# EAGLE board 12VAttinyDischargeChecker-B2 (EAGLE 8.5.2)
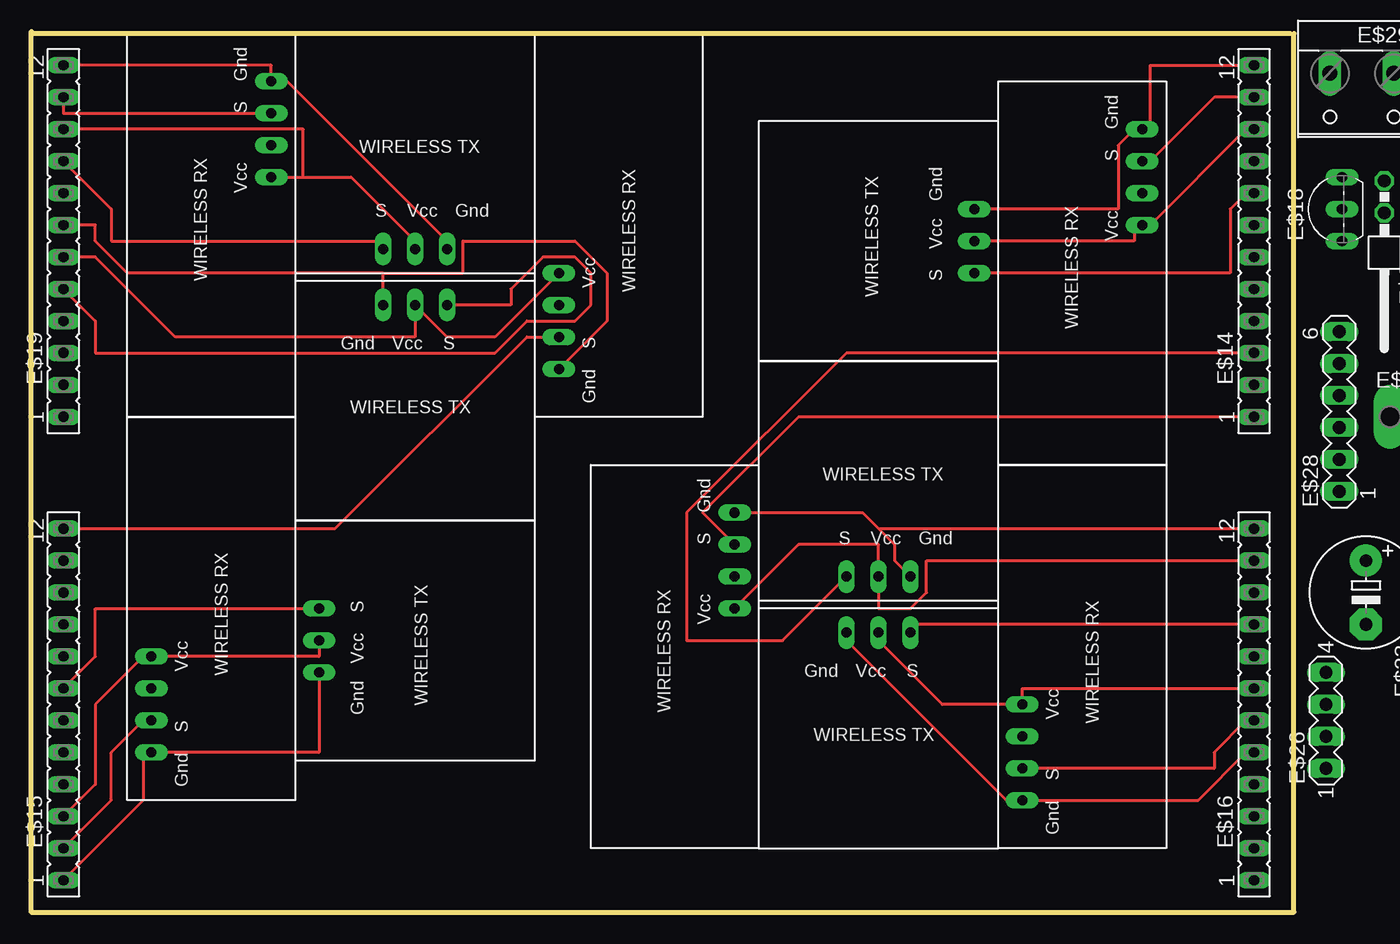
[diagram p0: board, top side]

Size 100.33 x 70 mm. Coordinates in mm from the lower left corner, seen from the top.
Outline: 0,69.85 0,0 100.33,0 100.33,69.85
Outline: 0,69.85 0,70
Outline: 0,69.85 100,69.85
Copper layers (1*16): Top 0.035mm / dielectric 1.5mm / Bottom 0.035mm
Design rules "default": minimum track width 10mil, minimum drill 24mil, track to track 8mil, track to pad 8mil, pad to pad 8mil, via to via 8mil, smd to smd 8mil, copper to edge 40mil, drill to drill 8mil, minimum pad ring 10mil, minimum via ring 8mil, stop-mask expansion 4mil, vias tented up to drill 0mil, thermal gap 10mil

## Footprints (pad centres in the part's own frame; a part is rotated, then mirrored left to right if it is on the bottom)
WIRELESS-RX-FLAT = drill 0.8 long: P$1 3.81,-6.985; P$2 6.35,-6.985; P$3 8.89,-6.985; P$4 11.43,-6.985
WIRELESS-TX-FLAT = drill 0.8 long: P$1 0.635,-6.35; P$2 -1.905,-6.35; P$3 3.175,-6.35
FE12 = drill 0.813 long: 1 -13.97,0; 2 -11.43,0; 3 -8.89,0; 4 -6.35,0; 5 -3.81,0; 6 -1.27,0; 7 1.27,0; 8 3.81,0; 9 6.35,0; 10 8.89,0; 11 11.43,0; 12 13.97,0
0204/7 = drill 0.813 octagon: 1 -3.81,0; 2 3.81,0
TO92- = drill 0.813 long: 1 2.54,0; 2 0,0; 3 -2.54,0
1X01/90 = drill 1.016 long: 1 -1.27,-3.81
E5-8,5 = drill 1.016 pad 2.54: + -2.54,0 | drill 1.016 pad 2.54 octagon: - 2.54,0
MA04-1 = drill 1.016 long: 1 -3.81,0; 2 -1.27,0; 3 1.27,0; 4 3.81,0
MA06-1 = drill 1.016 long: 1 -6.35,0; 2 -3.81,0; 3 -1.27,0; 4 1.27,0; 5 3.81,0; 6 6.35,0
W237-132 = drill 1.194 long: 1 -2.54,-0.635; 2 2.54,-0.635
RS-2,5 = drill 0.813 pad 1.6 octagon: 1 -1.27,0; 2 1.27,0
2X02/90 = drill 1.016 octagon: 1 -1.27,-6.35; 2 -1.27,-3.81; 3 1.27,-6.35; 4 1.27,-3.81
P1-17Y = drill 1.702 pad 2.121 long: TP 0,0

## Placement (x,y rotation side)
E$1  [WIRELESS-RX-FLAT]  12.06,54.61 90 top
E$2  [WIRELESS-RX-FLAT]  16.51,24.13 270 top
E$3  [WIRELESS-TX-FLAT]  29.21,22.23 270 top
E$4  [WIRELESS-TX-FLAT]  29.84,59.05 0 top
E$5  [WIRELESS-RX-FLAT]  48.9,54.61 270 top
E$6  [WIRELESS-TX-FLAT]  31.11,41.91 180 top
E$7  [WIRELESS-RX-FLAT]  85.72,20.32 270 top
E$8  [WIRELESS-TX-FLAT]  67.94,15.88 180 top
E$9  [WIRELESS-RX-FLAT]  81.28,50.8 90 top
E$10  [WIRELESS-TX-FLAT]  68.58,52.7 90 top
E$11  [WIRELESS-RX-FLAT]  48.9,20.32 90 top
E$12  [WIRELESS-TX-FLAT]  66.67,33.02 0 top
E$14  [FE12]  97.16,53.34 90 top
E$15  [FE12]  2.54,16.51 90 top
E$16  [FE12]  97.16,16.51 90 top
E$17  [0204/7]  113.03,25.4 90 top  (outside the outline)
E$18  [TO92-]  104.14,55.88 90 top  (outside the outline)
E$19  [FE12]  2.54,53.34 90 top
E$22  [1X01/90]  112.39,40.01 180 top  (outside the outline)
E$23  [E5-8,5]  106.05,25.4 270 top  (outside the outline)
E$26  [MA04-1]  102.87,15.24 90 top
E$28  [MA06-1]  103.93,39.79 90 top  (outside the outline)
E$29  [W237-132]  105.73,66.04 180 top
E$30  [RS-2,5]  113.03,50.8 90 top  (outside the outline)
E$31  [2X02/90]  108.78,51.77 180 top  (outside the outline)
E$35  [MA04-1]  113.03,13.97 90 top  (outside the outline)
E$44  [P1-17Y]  107.95,39.37 0 top  (outside the outline)

## Library data of the parts
E$1-E$12 = LSGPackages
E$14-E$16 E$19 = con-lsta
E$17 = eagle-ltspice
E$18 = transistor-fet
E$22 E$31 = pinhead
E$23 = ref-packages-longpad
E$26 E$28 E$35 = con-lstb
E$29 = con-wago-508
E$30 = discrete
E$44 = testpad

## Nets
S$2: E$1.P$4 E$4.P$3 E$19.12
S$3: E$5.P$1 E$6.P$1 E$19.6
S$4: E$19.8
S$5: E$7.P$4 E$8.P$3 E$16.5
S$7: E$1.P$1 E$4.P$1 E$19.10
S$8: E$5.P$4 E$6.P$3 E$19.7
S$9: E$2.P$4 E$3.P$3 E$15.1
S$10: E$2.P$1 E$3.P$1 E$15.3
S$11: E$2.P$3 E$15.2
S$12: E$1.P$3 E$19.11
S$13: E$7.P$1 E$8.P$1 E$16.7
S$14: E$3.P$2 E$15.7
S$15: E$4.P$2 E$19.9
S$16: E$6.P$2 E$19.5
S$17: E$9.P$3 E$14.11
S$18: E$11.P$1 E$12.P$1 E$16.11
S$19: E$11.P$4 E$12.P$3 E$16.12
S$20: E$9.P$4 E$10.P$3 E$14.12
S$21: E$9.P$1 E$10.P$1 E$14.10
S$22: E$10.P$2 E$14.8
S$23: E$12.P$2 E$14.3
S$24: E$8.P$2 E$16.9
S$25: E$7.P$3 E$16.6
S$26: E$5.P$3 E$15.12
S$27: E$11.P$3 E$14.1

## Tracks (layer width: path | path; a pad name or v marks a point on that pad's centre or on a via)
S$2
  Top 0.254: E$4.P$3 33.02,53.34 20.32,66.04 E$1.P$4 19.05,67.31 E$19.12
S$3
  Top 0.254: E$5.P$1 36.83,45.72 33.02,45.72 E$6.P$1 30.48,45.72 11.43,45.72 5.08,52.07 E$19.6
S$5
  Top 0.254: E$8.P$3 64.77,21.59 77.47,8.89 E$7.P$4 92.71,8.89 96.52,12.7 E$16.5
S$7
  Top 0.254: E$1.P$1 21.59,58.42 | 21.59,58.42 25.4,58.42 30.48,53.34 E$4.P$1 | E$19.10 21.59,62.23 21.59,58.42
S$8
  Top 0.254: E$5.P$4 45.72,46.99 45.72,50.8 43.18,53.34 34.29,53.34 34.29,50.8 27.94,50.8 | E$6.P$3 27.94,50.8 | E$19.7 5.08,54.61 5.08,53.34 7.62,50.8 27.94,50.8
S$9
  Top 0.254: E$3.P$3 22.86,12.7 E$2.P$4 8.89,12.7 8.89,8.89 E$15.1
S$10
  Top 0.254: E$3.P$1 22.86,20.32 E$2.P$1 8.89,20.32 5.08,16.51 5.08,10.16 E$15.3
S$11
  Top 0.254: E$15.2 6.35,8.89 6.35,12.7 8.89,15.24 E$2.P$3
S$12
  Top 0.254: E$1.P$3 2.54,63.5 E$19.11
S$13
  Top 0.254: E$8.P$1 67.31,21.59 72.39,16.51 E$7.P$1 78.74,17.78 E$16.7
S$14
  Top 0.254: E$3.P$2 5.08,24.13 5.08,20.32 E$15.7
S$15
  Top 0.254: E$19.9 6.35,55.88 6.35,53.34 27.94,53.34 E$4.P$2
S$16
  Top 0.254: E$6.P$2 38.1,48.26 38.1,49.53 40.64,52.07 43.18,52.07 44.45,50.8 44.45,48.26 43.18,46.99 39.37,46.99 36.83,44.45 5.08,44.45 5.08,46.99 E$19.5
S$17
  Top 0.254: E$14.11 93.98,64.77 88.9,59.69 E$9.P$3
S$18
  Top 0.254: E$11.P$1 60.96,29.21 67.31,29.21 E$12.P$1 67.31,24.13 69.85,24.13 71.12,25.4 71.12,27.94 E$16.11
S$19
  Top 0.254: E$12.P$3 68.58,27.94 68.58,29.21 67.31,30.48 | 67.31,30.48 66.04,31.75 E$11.P$4 | 67.31,30.48 E$16.12
S$20
  Top 0.254: E$10.P$3 86.36,55.88 86.36,60.96 87.63,62.23 E$9.P$4 88.9,62.23 88.9,67.31 E$14.12
S$21
  Top 0.254: E$10.P$1 87.63,53.34 87.63,54.61 E$9.P$1 88.9,54.61 96.52,62.23 E$14.10
S$22
  Top 0.254: E$10.P$2 95.25,50.8 95.25,55.88 96.52,57.15 E$14.8
S$23
  Top 0.254: E$12.P$2 59.69,21.59 52.07,21.59 52.07,31.75 64.77,44.45 E$14.3
S$24
  Top 0.254: E$16.9 69.85,22.86 E$8.P$2
S$25
  Top 0.254: E$7.P$3 93.98,11.43 93.98,12.7 96.52,15.24 E$16.6
S$26
  Top 0.254: E$5.P$3 39.37,45.72 24.13,30.48 E$15.12
S$27
  Top 0.254: E$11.P$3 53.34,31.75 60.96,39.37 E$14.1

## Text on the board
bTest: B0 | B2 | B5 | B5 | B0 | B3 | B1 | B2 | B3 | B4 | B1 | B4